# Altium PCB recall_ble_v0_1.PcbDoc
Units mil, origin at the board's own origin, x right, y up, seen from the top; angles counter-clockwise.
Board outline 1280 x 940 mil, 2 copper layers (Component Side, Bottom Layer), stack 12.8 mil thick; 30 components, 23 nets, 122 pads, 30 vias.
Unrouted connection lines stored in the file: 1.
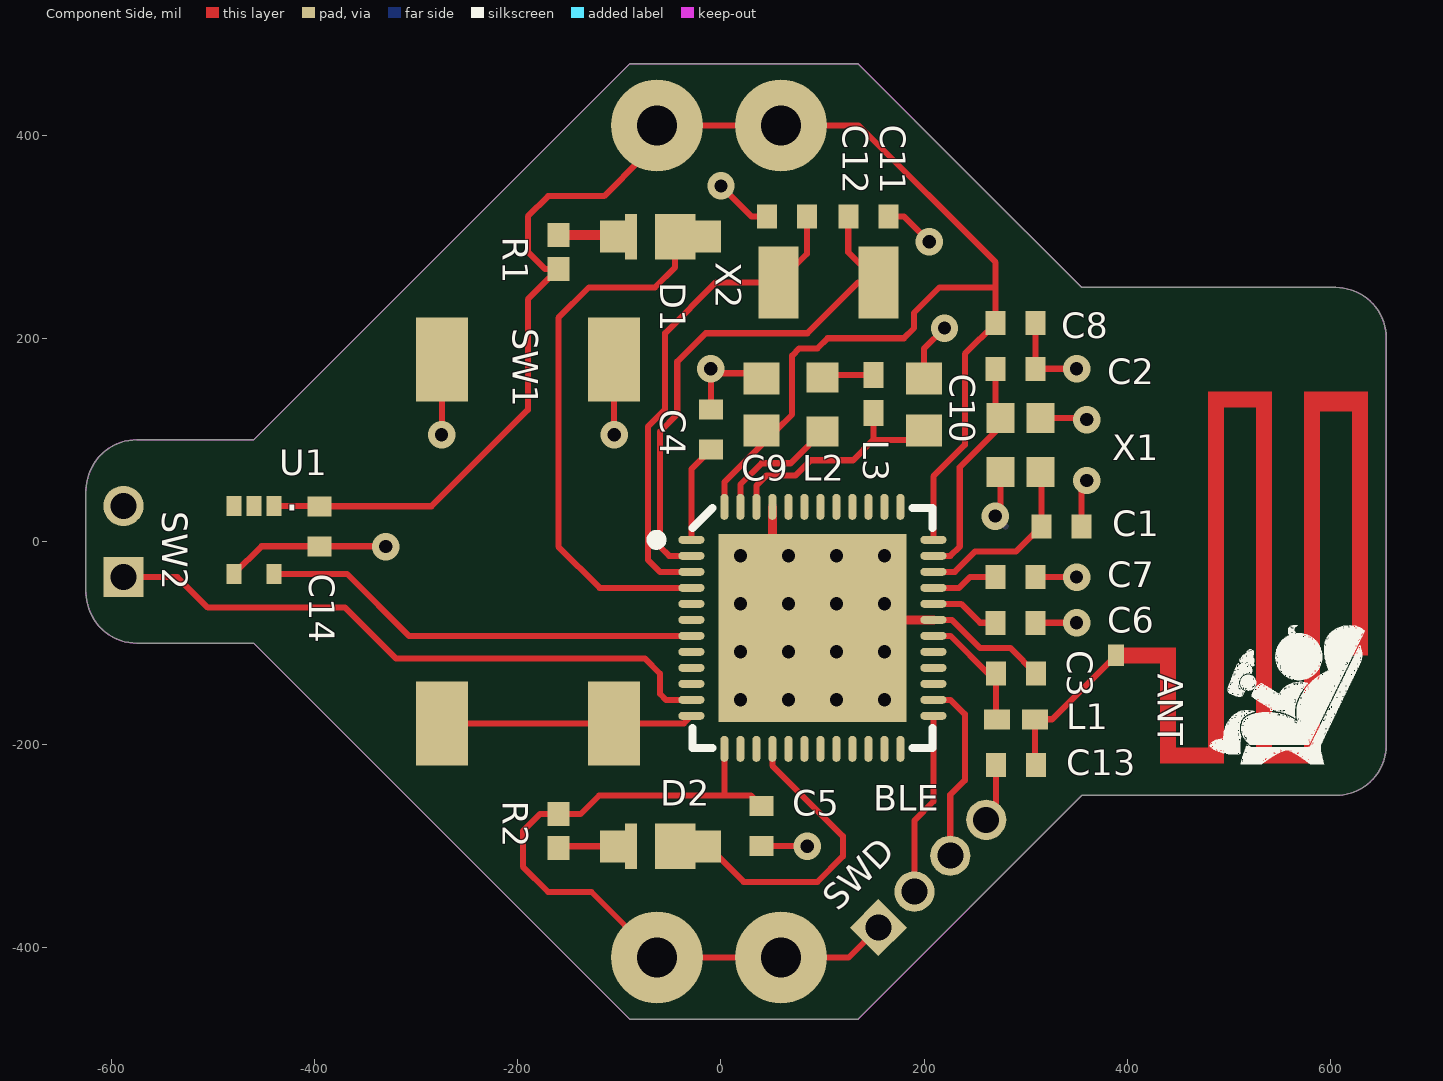
[diagram p0: Component Side view]
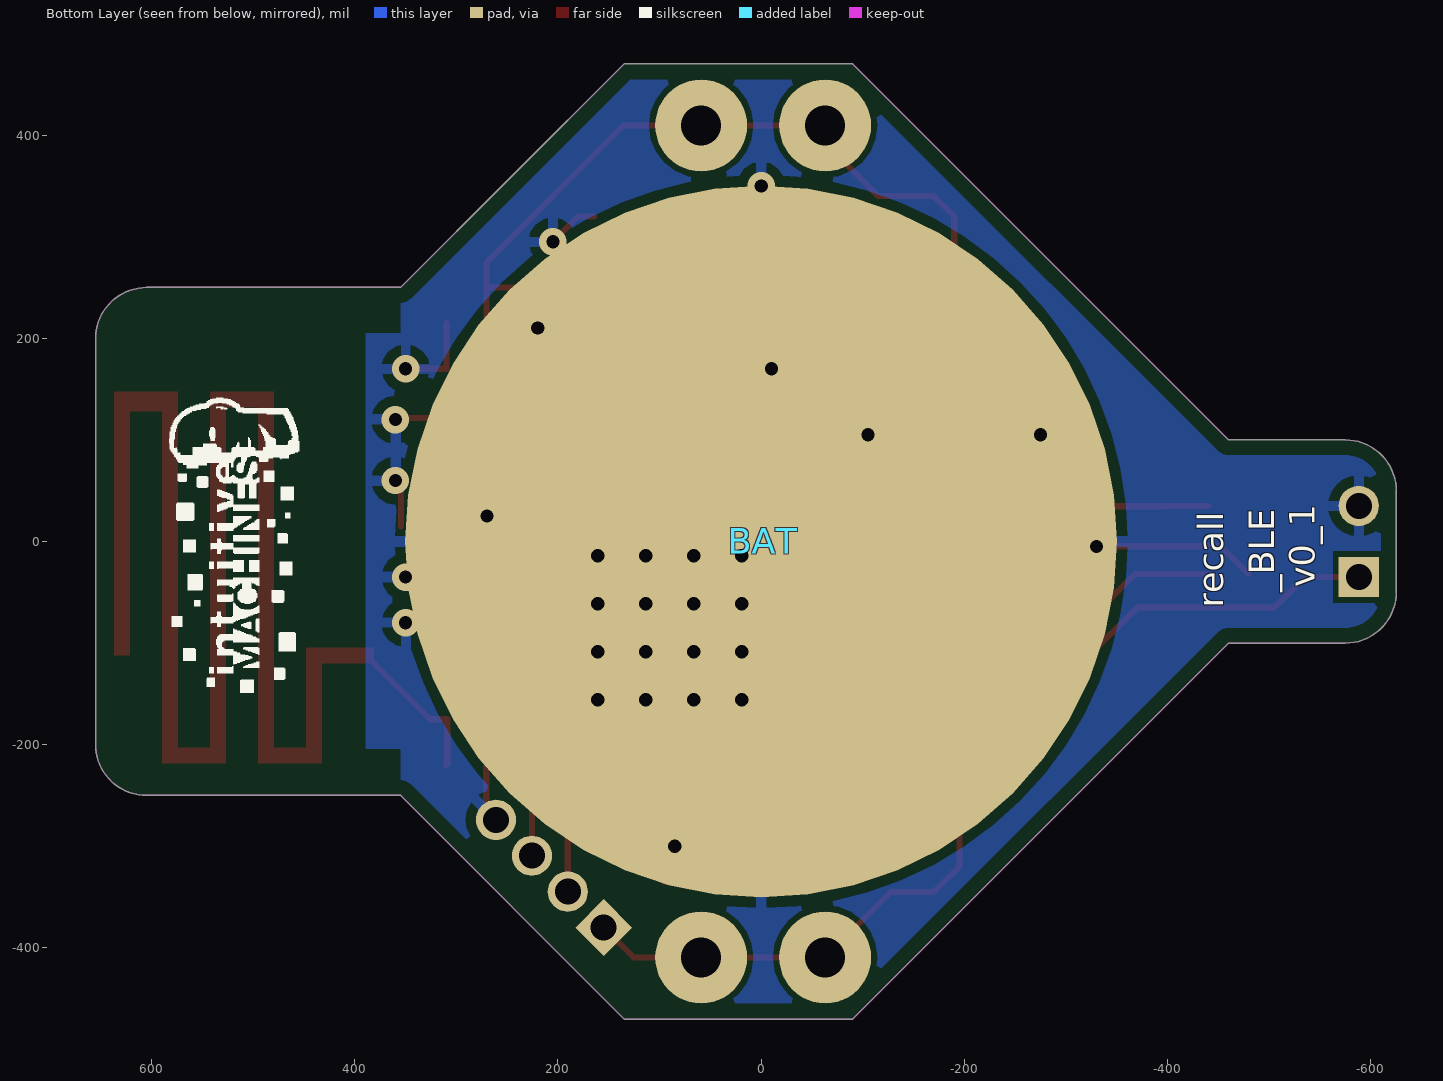
[diagram p1: Bottom Layer view, seen from below]
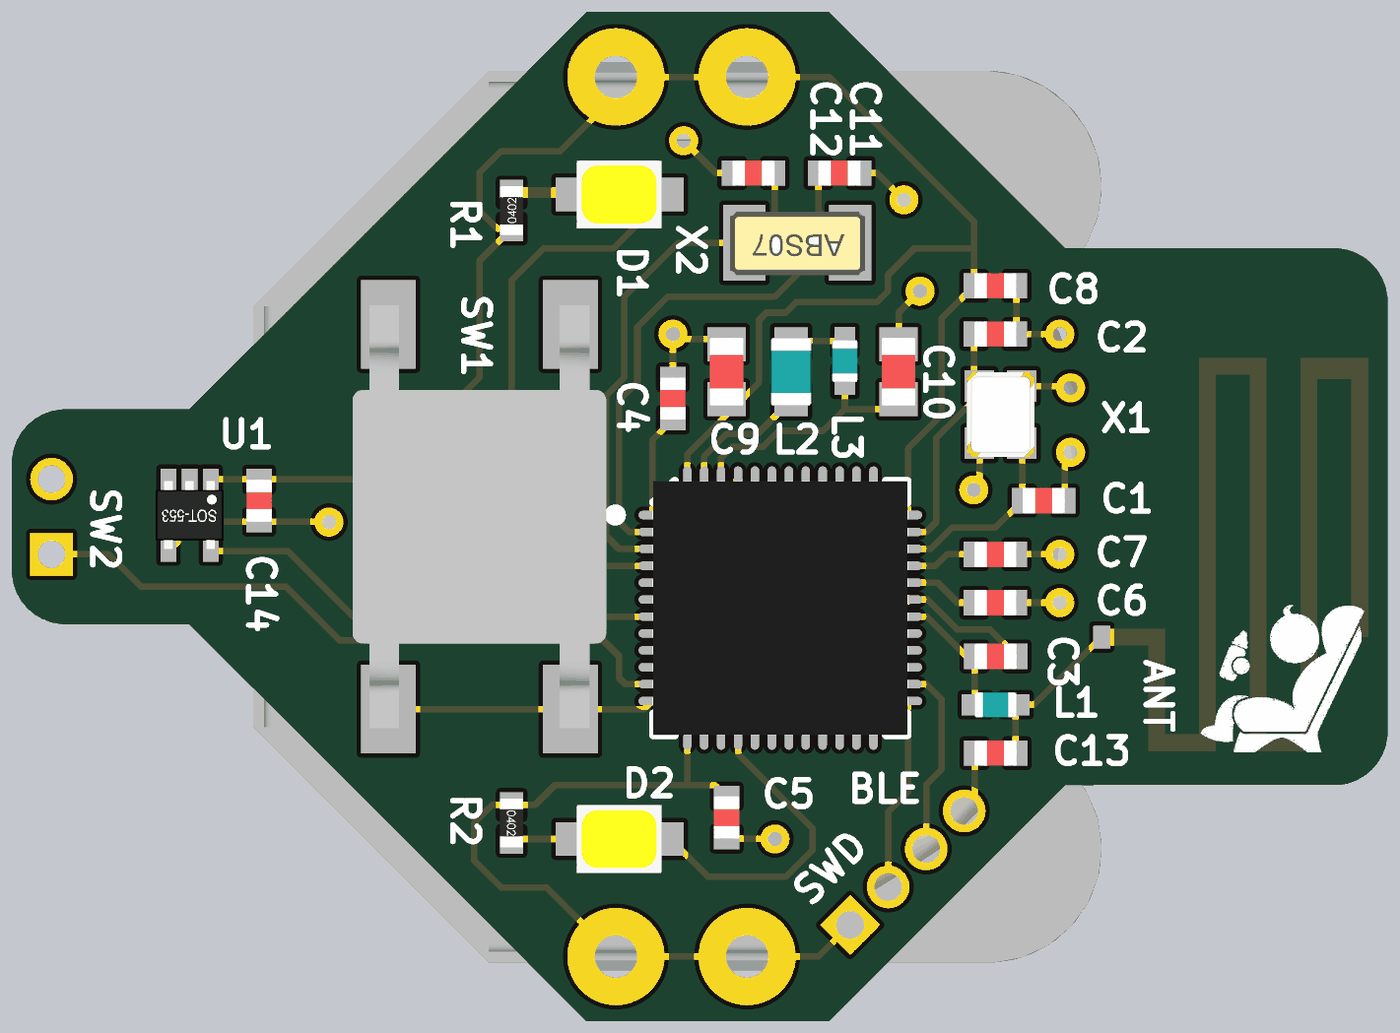
[diagram p2: 3D render of the assembled board from above, using the file's embedded part models]

## Layer stack, top to bottom
Top Solder: solder mask 0.4, Solder Resist, Dk 3.5
Component Side: signal copper 1.4
Dielectric 1: core 10, FR-4, Dk 4.2
Bottom Layer: signal copper 1.4
Solder Side: solder mask 0.4, Solder Resist, Dk 3.5

## Board outline
-575,-100 cw(c-575,-50) -625,-50 -625,50 cw(c-575,50) -575,100 -460,100 -90,470 135,470 245,360 355,250 605,250 cw(c605,200) 655,200 655,-200 cw(c605,-200) 605,-250 355,-250 135,-470 -90,-470 -460,-100

## Design rules (kind name [scope] priority, off if disabled: settings)
BoardOutlineClearance [All] p1: gap=15
Clearance [All] p1: gap=6
HoleSize [All] p1: absolutevalues=TRUE maxlimit=100 minlimit=13 maxpercent=80.000 minpercent=20.000
HoleToHoleClearance [All] p1: gap=6 allowstackedmicrovias=TRUE
MinimumAnnularRing [All] p1: minimumring=7
MinimumSolderMaskSliver [All] p1: minsoldermaskwidth=0
PolygonConnect [All] p1: connectstyle=Relief reliefconductorwidth=10 reliefentries=4 polygonreliefangle="90 Angle" airgapwidth=10
RoomDefinition recall_ble_v0_1 [InComponentClass('recall_ble_v0_1')] p1: confinementstyle=ConfineIn formatcopy=TRUE lockcomponents=FALSE outline -3105,-2070 3685,-2070 3685,2625 -3105,2625
RoutingVias [All] p1: holewidth=13 width=27 viastyle="Through Hole" minholewidth=13 minwidth=27 maxholewidth=28 maxwidth=50
SilkToSilkClearance [All] p1: silktosilkclearance=6
SilkToSolderMaskClearance [IsPad] p1: minsilkscreentomaskgap=0 clearancetoexposedcopper=TRUE
SolderMaskExpansion [All] p1: expansion=4
Width [All] p1: maxlimit=50 minlimit=6 preferedwidth=6
25 further rules are at their usual default settings.

## Components (designator, comment, footprint, x,y, rotation, side; value= is the part's Value field where it differs from the comment)
ANT "ANTENNA" ANTENNA_PCB 389,-112 r270 top
BAT "CR2032" BAT-HLD-001-THM 0,0 r90 bottom locked
BLE "nRF52832-QFAA" QFN40P600X600X90-48N 90,-85 r0 top
C1 "CAP" CAP_0402R 335,15 r0 top
C2 "CAP" CAP_0402R 290,170 r0 top
C3 "CAP" CAP_0402R 290.31,-130 r180 top
C4 "CAP" CAP_0402R -10,110 r270 top
C5 "CAP" CAP_0402R 40,-280 r90 top
C6 "CAP" CAP_0402R 290,-80 r0 top
C7 "CAP" CAP_0402R 290,-35 r0 top
C8 "CAP" CAP_0402R 290,215 r180 top
C9 "CAP" CAP_0603R 40,135 r270 top
C10 "CAP" CAP_0603R 200,135 r270 top
C11 "CAP" CAP_0402R 145,320 r180 top
C12 "CAP" CAP_0402R 65,320 r0 top
C13 "CAP" CAP_0402R 290.31,-220 r0 top
C14 "CAP" CAP_0402R -395,15 r90 top
D1 "MP2016" MP2016_centered -60,300 r180 top
D2 "MP2016" MP2016_centered -60,-300 r180 top
L1 "3.9nH" INDC1005X04L 290.31,-175 r0 top
L2 "10µH" INDC1608X06L 100,135 r270 top
L3 "15nH" INDC1005X04L 150,145 r90 top
R1 "RES" RES_0402 -160,285 r90 top
R2 "RES" RES_0402 -160,-285 r270 top
SW1 "4-1437565-1" 4-1437565-1 -190,0 r180 top locked
SW2 "DDS001" DDS001 -588.15,-35 r90 top
SWD "Header 4" HDR1X4_SWD 155,-380 r45 top
U1 "AH1892" sot-553 -440,35 r180 top
X1 "32MHz" XRCGB 295,95 r90 top
X2 "ABS07" ABS07 155,255 r180 top

## Footprints (in the part's own frame and the unit in brackets; to place one, negate y for a bottom-side part, rotate by r counter-clockwise, add the part's x,y. Pads: shape width x height; smd on the part's side, far side on the other; paste and mask are expansions set on the pad)
4-1437565-1 [mm] "TE Tactile Switch, 6mm x 6mm x 4mm"
  rect 1.3x2.1 smd: 1(-2.15,4.55) 1(2.15,4.55) 2(-2.15,-4.55) 2(2.15,-4.55)
  body extent -3,-5 3,5, height 5.05
ABS07 [mm] "ABS07-32.768KHZ-T"
  rect 1x1.8 smd: 1(0,0) 2(2.5,0)
  body extent -0.36,-0.74 2.84,0.76, height 0.89
ANTENNA_PCB [mm] "ST meander PCB antenna for 2.4GHz radio"
  rect 0.54x0.4 smd: 1(0,0)
  Component Side region: -6.6,5.9 0,5.9 0,6.3 -6.6,6.3
  Component Side region: -6.6,4.7 2.7,4.7 2.7,5.1 -6.6,5.1
  Component Side region: -6.6,3.5 2.7,3.5 2.7,3.9 -6.6,3.9
  Component Side region: -6.6,4.7 -6.1,4.7 -6.1,6.3 -6.6,6.3
  Component Side region: 2.3,3.5 2.7,3.5 2.7,5.1 2.3,5.1
  Component Side region: -6.6,2.3 -6.2,2.3 -6.2,3.9 -6.6,3.9
  Component Side region: -6.6,2.3 2.7,2.3 2.7,2.7 -6.6,2.7
  Component Side region: 2.7,1.5 -0.2,1.5 -0.2,1.1 2.7,1.1
  Component Side region: -0.2,-0.2 0.2,-0.2 0.2,1.5 -0.2,1.5
  Component Side region: 2.3,1.1 2.7,1.1 2.7,2.7 2.3,2.7
  Bottom Layer pour cut-out: -10,0 -10,7 3.5,7 3.5,0
BAT-HLD-001-THM [mm] "Battery holder for CR2032"
  round 2.3 hole 1: 1(-10.4,-1.6) 1(-10.4,1.5) 1(10.4,-1.6) 1(10.4,1.5)
  round 17.8 smd: 2(0,0)
  body extent -10.74,-10.17 10.74,9.88, height 3.96
CAP_0402R [mm] "Capacitor 0402 reflow soldering"
  rect 0.5x0.6 smd: 1(-0.5,0) 2(0.5,0)
  body extent -0.5,-0.3 0.5,0.3, height 0.2
CAP_0603R [mm] "capacitor 0603 reflow soldering"
  rect 0.8x0.9 smd: 1(-0.65,0) 2(0.65,0)
  body extent -0.8,-0.4 0.8,0.4, height 0.3
DDS001 [mm] "Micro Mini Thru-hole Detect Switches"
  rect 1.006x1.006 hole 0.65: 1(0,0)
  round 1.006 hole 0.65: 2(1.778,0)
HDR1X4_SWD [mm] "Connector; Header; 1x4Position"
  rect 1.006x1.006 hole 0.65: 1(0,0)
  round 1.006 hole 0.65: 2(1.27,0) 3(2.54,0) 4(3.81,0)
INDC1005X04L [mm]
  rect 0.65x0.5 smd: 1(-0.475,0) 2(0.475,0)
  body extent -0.5,-0.3 0.5,0.3, height 0.5
INDC1608X06L [mm]
  rect 0.75x0.8 smd: 1(-0.675,0) 2(0.675,0)
  body extent -0.8,-0.48 0.8,0.48, height 0.8
MP2016_centered [mm] "Luminus XNOVA LED"
  rect 0.3x1.14 smd: A(0.731,0)
  rect 0.65x0.8 smd: A(1.181,0) C(-1.204,0)
  rect 1.02x1.14 smd: C(-0.379,0)
  body extent -1,-0.8 1,0.8, height 0.55
QFN40P600X600X90-48N [mm]
  oval 0.65x0.2 smd: 1(-3.025,2.2) 2(-3.025,1.8) 3(-3.025,1.4) 4(-3.025,1) 5(-3.025,0.6) 6(-3.025,0.2) 7(-3.025,-0.2) 8(-3.025,-0.6) 9(-3.025,-1) 10(-3.025,-1.4) 11(-3.025,-1.8) 12(-3.025,-2.2) 25(3.025,-2.2) 26(3.025,-1.8) 27(3.025,-1.4) 28(3.025,-1) 29(3.025,-0.6) 30(3.025,-0.2) 31(3.025,0.2) 32(3.025,0.6) 33(3.025,1) 34(3.025,1.4) 35(3.025,1.8) 36(3.025,2.2)
  oval 0.2x0.65 smd: 13(-2.2,-3.025) 14(-1.8,-3.025) 15(-1.4,-3.025) 16(-1,-3.025) 17(-0.6,-3.025) 18(-0.2,-3.025) 19(0.2,-3.025) 20(0.6,-3.025) 21(1,-3.025) 22(1.4,-3.025) 23(1.8,-3.025) 24(2.2,-3.025) 37(2.2,3.025) 38(1.8,3.025) 39(1.4,3.025) 40(1,3.025) 41(0.6,3.025) 42(0.2,3.025) 43(-0.2,3.025) 44(-0.6,3.025) 45(-1,3.025) 46(-1.4,3.025) 47(-1.8,3.025) 48(-2.2,3.025)
  rect 4.7x4.7 smd: 49(0,0)
  silkscreen extent -4.02,-3 3,3, body extent -3.02,-3.02 3.02,3.02, height 0.86
RES_0402 [mm]
  rect 0.6x0.55 smd: 1(-0.425,0) 2(0.425,0)
  body extent -0.58,-0.28 0.57,0.27, height 0.41
sot-553 [mm]
  rect 0.375x0.5 smd: 1(0,0) 2(0.5,0) 3(1,0) 4(1,1.7) 5(0,1.7)
  body extent -0.3,0.05 1.3,1.65, height 0.5
XRCGB [mm] "32MHz Crystal, XRCGB32M000F2P00R0"
  rect 0.75x0.7 smd: 1(-0.675,-0.5) 2(0.675,-0.5) 3(0.675,0.5) 4(-0.675,0.5)
  body extent -1,-0.8 1,0.8, height 0.65

## Part data
ANT: "PCB Antenna for BLE"
BAT: library part Battery
BLE: "Multi-protocol Bluetooth Low Energy and 2.4GHz proprietary system-on-chip"
C1 C2 C3 C4 C5 C6 C7 C8 C9 C10 C11 C12 C13 C14: "Capacitor"
D1 D2: "MP2016 White LED"
L1 L3: "High frequency chip inductor ±10%"
L2: "Chip inductor, IDC,min = 50 mA, ±20%"
R1 R2: "Resistor"
SW1: library part SW-TACT, "Translucent Conductive Silicone Elastomer Switch"
SW2: library part SW-PB, "Translucent Conductive Silicone Elastomer Switch"
SWD: "Header, 4-Pin"
U1: "Hall effect switch"
X1: "XTAL SMD 2016, 32MHz, Cl=6pF, Total Tol: ±40ppm"
X2: "ABS25"

## Via types
v1: diameter 27, hole 13, Component Side to Bottom Layer, 30 vias

## Nets (pads, with @x,y where several pads share a name; then routed paths per layer and width w, separated by ;. In a path a pad name is that pad's centre, name@x,y a point inside that pad or via, vN(x,y) a via of type N, cw(c..) or ccw(c..) an arc to the next point about the centre after c; other vN are vias at no path point)
ANT: ANT.1 C13.2 L1.2 | length 151.5
  Component Side w6: C13.2 309.02,-219.02 L1.2 326,-175 ANT.1
D1_CTRLN: BLE.4 D1.C | length 538.4
  Component Side w6: D1.C@-45.06,300 -45.06,269.94 -65,250 -130,250 -160,220 -160,-5 -119.37,-45.63 BLE.4
D2_CTRLN: BLE.16 D2.C | length 292.1
  Component Side w6: D2.C@-12.58,-300 22.42,-335 95,-335 120,-310 120,-290 50.63,-220.63 BLE.16
DEC1: BLE.1 C4.2 | length 96.6
  Component Side w6: BLE.1 -29.09,71.22 C4.2
DEC2: BLE.32 C6.1 | length 68.9
  Component Side w6: BLE.32 236.38,-61.38 255,-80 C6.1
DEC3: BLE.33 C7.1 | length 65.6
  Component Side w6: BLE.33 234.37,-45.63 245,-35 C7.1
DEC4: BLE.46 C10.2 L3.1 | length 234.8
  Component Side w6: BLE.46 34.88,54.88 45,65 73.55,65 88.55,80 130,80 150,100 ; L3.1 150,100 ; C10.2 190.59,100 150,100
GND: BAT.2 BLE.31 BLE.45 BLE.49 C1.2 C2.2 C3.1 C4.1 C5.1 C6.2 C7.2 C8.1 C9.1 C10.1 C11.1 C12.1 C13.1 C14.1 SW1.2 SW2.2 SWD.4 U1.4 X1.2 X1.4 | length 1379.2
  Component Side w6: U1.4 -452.13,-4.69 C14.1 -330.31,-4.69 v1(-330,-5) ; v1@-274.65,105.35 SW1.2@-274.65,179.13 ; v1@-105.35,105.35 SW1.2@-105.35,179.13 ; C4.1 v1(-10,170) -5.59,165.59 C9.1@40,165.59 ; v1@0.31,360 0,359.69 v1(0,350) 30,320 C12.1 ; C5.1 84.69,-299.69 v1(85,-300) ; C11.1 180,320 v1(205,295) ; C10.1 200,190 v1(220,210) ; BLE.31 227.13,-77.13 255,-105 285,-105 C3.1 ; SWD.4 270.63,-264.37 C13.1 ; v1(270,25) 275.31,30.31 X1.4 ; C6.2 v1(350,-80) ; C7.2 v1(350,-35) ; C8.1 C2.2 v1(350,170) ; X1.2 358.43,121.57 v1(360,120) ; C1.2 354.69,54.69 v1(360,60)
  Component Side w9: BLE.45 50.63,-45.63 v1(66.38,-61.38) BLE.49 97.87,-77.13 BLE.31
  Bottom Layer w6: v1(270,25) BAT.2@280,15
  other v1: 19.13,-155.87 66.38,-155.87 113.62,-155.87 160.87,-155.87 19.13,-108.62 66.38,-108.62 113.62,-108.62 160.87,-108.62 19.13,-61.38 113.62,-61.38 160.87,-61.38 19.13,-14.13 66.38,-14.13 113.62,-14.13 160.87,-14.13 -275,105 -105,105
MAG_OUTN: BLE.7 U1.5 | length 436.1
  Component Side w6: U1.5 -368.07,-31.93 -307.13,-92.87 BLE.7
NetBLE_30: BLE.30 C3.2 L1.1 | length 122.3
  Component Side w6: BLE.30 225.9,-92.87 263.03,-130 C3.2 270.63,-174.02 L1.1
NetBLE_47: BLE.47 L2.2 | length 124.5
  Component Side w6: BLE.47 19.13,56.1 40.03,77 68.57,77 L2.2
NetD1_A: D1.A R1.2 | length 54.2
  Component Side w10: R1.2 -108.21,301.73 D1.A@-106.48,300
NetD2_A: D2.A R2.2 | length 54.2
  Component Side w6: R2.2 -158.27,-300 D2.A@-106.48,-300
NetL2_1: L2.1 L3.2 | length 50.9
  Component Side w6: L2.1 102.13,163.7 L3.2
SW1N: BLE.12 SW1.1 | length 248.7
  Component Side w6: SW1.1@-274.65,-179.13 -105.35,-179.13 -36.61,-179.13 BLE.12
SW2N: BLE.11 SW2.1 | length 620.8
  Component Side w6: SW2.1 -535,-35 -505,-65 -370,-65 -320,-115 -75,-115 -60,-130 -60,-150 -54.13,-155.87 BLE.11
SWDCLK: BLE.25 SWD.2 | length 180.8
  Component Side w6: SWD.2 190.36,-274.64 209.09,-255.91 BLE.25
SWDIO: BLE.26 SWD.3 | length 182
  Component Side w6: BLE.26 225.87,-155.87 240,-170 240,-235 225.71,-249.29 SWD.3
VDD: BAT.1 BLE.13 BLE.36 BLE.48 C5.2 C8.2 C9.2 C14.2 R1.1 R2.1 SWD.1 U1.1 | length 2539.4
  Component Side w6: U1.1 -395.31,35 C14.2 -285,34.69 -190,129.69 -190,238.27 R1.1 -173.27,268.27 -190,285 -190,320 -170,340 -115,340 -77.99,377.01 -62.99,377.01 -62.99,409.45 135.55,409.45 270.31,274.69 270.31,250 ; BLE.13 3.39,-248.39 5,-250 ; BLE.48 3.39,58.39 40,95 C9.2 54.41,109.41 70,125 70,183 77,190 95,190 105,200 180,200 190,210 190,225 215,250 270.31,250 ; C5.2 29.69,-250 5,-250 ; SWD.1 125.55,-409.45 -62.99,-409.45 -127.44,-345 -170,-345 -195,-320 -195,-285 -178.27,-268.27 R2.1 -138.27,-268.27 -120,-250 5,-250 ; BLE.36 209.09,64.09 240,95 240,184.69 C8.2 270.31,250
XC1: BLE.34 C1.1 X1.1 | length 181.8
  Component Side w6: BLE.34 230.12,-29.88 250,-10 290.31,-10 C1.1 315.31,67.8 X1.1 ; X1.1@320.31,59.13 X1.1@322.64,61.46
XC2: BLE.35 C2.1 X1.3 | length 223.1
  Component Side w6: BLE.35 225.87,-14.13 235,-5 235,73.03 274.82,112.85 274.82,121.08 270.31,125.59 C2.1
XL1: BLE.2 C11.2 X2.1 | length 531.3
  Component Side w6: BLE.2 -50.87,-14.13 -60,-5 -60,108.03 -43,125.03 -43,177 -15,205 85,205 135,255 X2.1 125.31,284.69 C11.2
XL2: BLE.3 C12.2 X2.2 | length 486.8
  Component Side w6: BLE.3 -60.12,-29.88 -72,-18 -72,113 -55,130 -55,205 -5,255 X2.2 84.69,283.11 C12.2
pads on no net: BLE.5 BLE.6 BLE.8 BLE.9 BLE.10 BLE.14 BLE.15 BLE.17 BLE.18 BLE.19 BLE.20 BLE.21 BLE.22 BLE.23 BLE.24 BLE.27 BLE.28 BLE.29 BLE.37 BLE.38 BLE.39 BLE.40 BLE.41 BLE.42 BLE.43 BLE.44 U1.2 U1.3

## Polygon pours and split planes (outlines as drawn)
GND on Bottom Layer "Ground Plane" (solid, remove dead copper, pour order 6): -640,-100 -640,100 -460,100 -90,470 135,470 355,250 355,205 541,205 541,-204 356,-204 355,-205 355,-250 135,-470 -90,-470 -460,-100

## Keep-outs
Keep-Out Layer:
  lines w1: -625,-50 ccw(c-575,-50) -575,-100 -550,-100 -460,-100 -90,-470 135,-470 355,-250 541,-250 605,-250 ccw(c605,-200) 655,-200 655,200 ccw(c605,200) 605,250 541,250 355,250 245,360 135,470 -90,470 -460,100 -555,100 -575,100 ccw(c-575,50) -625,50 -625,30 -625,-30 -625,-50

## Silkscreen, mask and mechanical layers (free items; w line width, h text height)
Top Overlay:
  drawing of 8 lines, arcs and shapes, not listed
Bottom Overlay:
  drawing of 41 lines, arcs and shapes, not listed
  text "v0_1" at -545,-45 h25 r270
  text "_BLE" at -505,-50 h25 r270
  text "recall" at -455,-65 h25 r270
Mechanical 11:
  circle w1: c0,0 r393.7